# EAGLE board ict_v361-xs-180 (EAGLE 9.6.2)
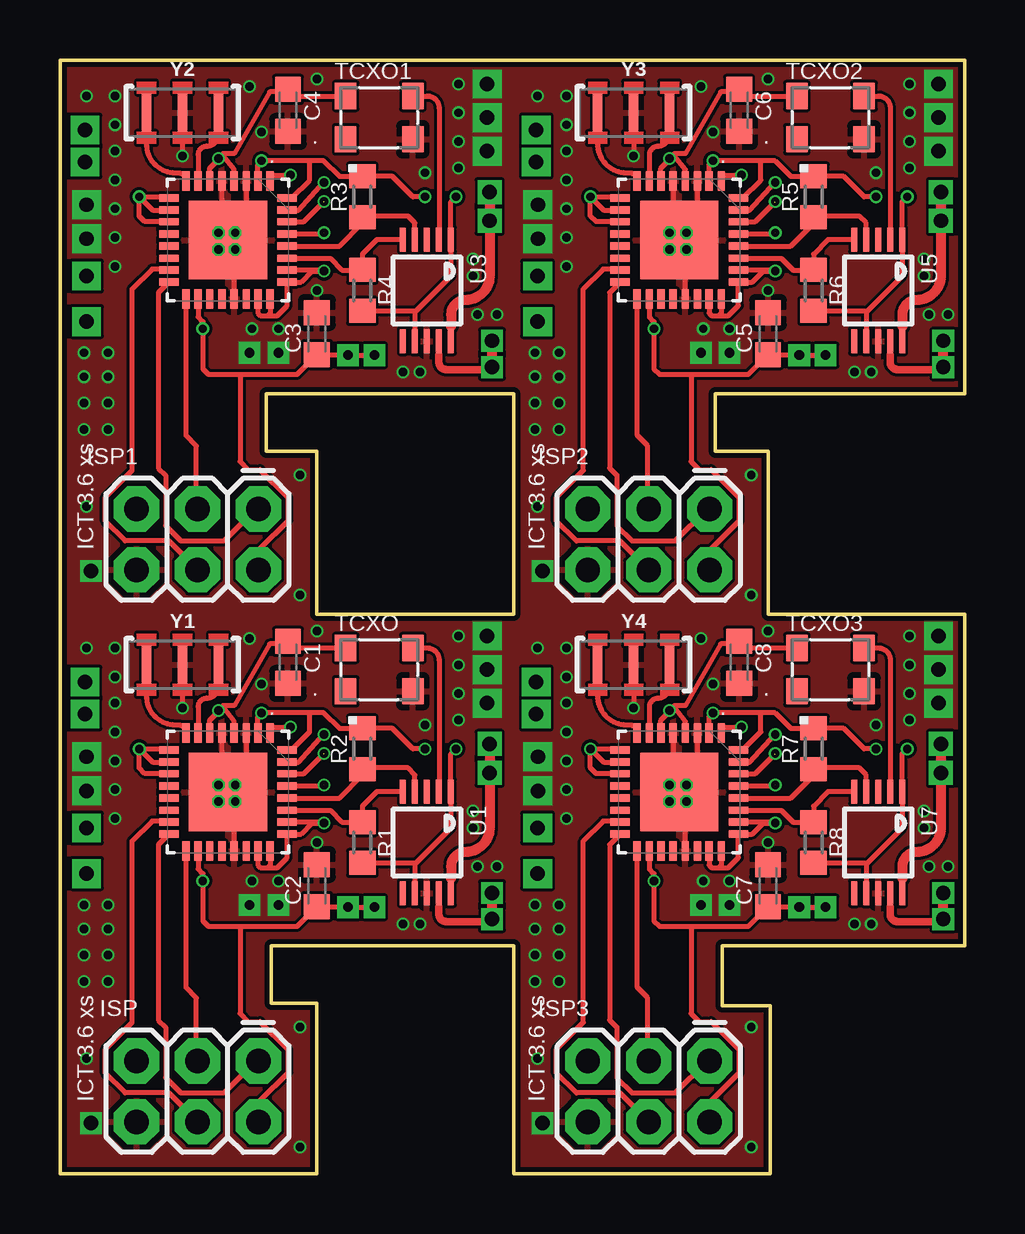
[diagram p0: board, top side]
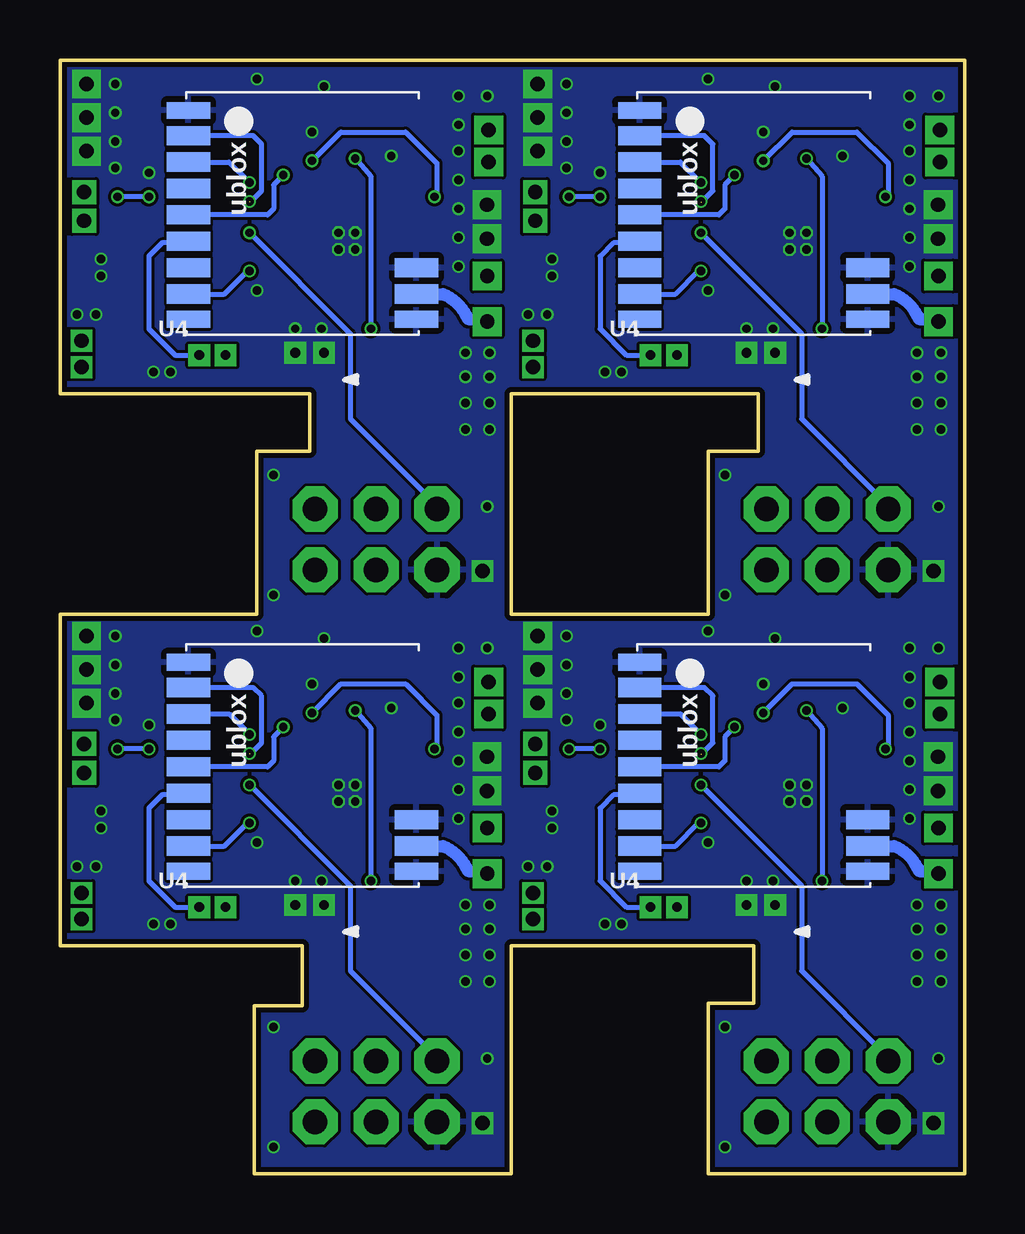
[diagram p1: board, bottom side, seen from below]

Size 37.7 x 46.4 mm. Coordinates in mm from the lower left corner, seen from the top.
Outline: 0,46.4 0,0 10.7,0 10.7,7.1 8.8,7.1 8.8,9.5 18.9,9.5 18.9,0 29.6,0 29.6,7 27.6,7 27.6,9.5 37.7,9.5 37.7,23.3 29.5,23.3 29.5,30.1 27.3,30.1 27.3,32.5 37.7,32.5 37.7,46.4 0,46.4
Outline: 10.7,30.1 10.7,23.3 18.9,23.3 18.9,32.5 8.6,32.5 8.6,30.1 10.7,30.1
Copper layers (1*16): Top 0.035559375mm / dielectric 1.6mm / Bottom 0.035559375mm
Design rules "jlcpcb2layer *": minimum track width 5mil, minimum drill 12mil, track to track 5mil, track to pad 5mil, pad to pad 5mil, via to via 5mil, smd to smd 5mil, copper to edge 8mil, drill to drill 6mil, minimum pad ring 5mil, minimum via ring 3mil, stop-mask expansion 2.5mil, vias tented up to drill 14mil, thermal gap 10mil
Net classes: 0 default: width 0.203 mm; 1 vcc: width 0.152 mm, clearance 0.152 mm

## Footprints (pad centres in the part's own frame; a part is rotated, then mirrored left to right if it is on the bottom)
C0603K = smd 1.05 x 1.08: 1 -0.875,0; 2 0.875,0
UBLOX_MAX = smd 1.8 x 0.7: 1_GND 4.95,-4.4; 9_V_RESET 4.95,4.3; 10_GND -4.55,4.3 | smd 1.8 x 0.8: 2_TXD1 4.95,-3.35; 3_RXD1 4.95,-2.25; 4_TIMEPULSE 4.95,-1.15; 5_EXTINT0 4.95,-0.05; 6_V_BCKP 4.95,1.05; 7_VCC_IO 4.95,2.15; 8_VCC 4.95,3.25; 11_RF_IN -4.55,3.25; 12_GND -4.55,2.15
2X3 = drill 1.016 pad 1.88 octagon: 1 0,0; 2 0,2.54; 3 2.54,0; 4 2.54,2.54; 5 5.08,0; 6 5.08,2.54
R0603 = smd 1 x 1.1: 1 -0.85,0; 2 0.85,0
3.2X2.5_KXO-84-TCXO = smd 0.9 x 1.1: 1 -1.4,-0.9; 2 1.4,-0.9; 3 1.4,0.9; 4 -1.4,0.9
MSOP10 = smd 0.25 x 1: 1 -1,-2.113; 2 -0.5,-2.113; 3 0,-2.113; 4 0.5,-2.113; 5 1,-2.113; 6 1,2.113; 7 0.5,2.113; 8 0,2.113; 9 -0.5,2.113; 10 -1,2.113
QFN50P500X500X100-33N = smd 0.813 x 0.305: 1 -2.464,1.753; 2 -2.464,1.245; 3 -2.464,0.762; 4 -2.464,0.254; 5 -2.464,-0.254; 6 -2.464,-0.762; 7 -2.464,-1.245; 8 -2.464,-1.753; 17 2.464,-1.753; 18 2.464,-1.245; 19 2.464,-0.762; 20 2.464,-0.254; 21 2.464,0.254; 22 2.464,0.762; 23 2.464,1.245; 24 2.464,1.753 | smd 0.305 x 0.813: 9 -1.753,-2.464; 10 -1.245,-2.464; 11 -0.762,-2.464; 12 -0.254,-2.464; 13 0.254,-2.464; 14 0.762,-2.464; 15 1.245,-2.464; 16 1.753,-2.464; 25 1.753,2.464; 26 1.245,2.464; 27 0.762,2.464; 28 0.254,2.464; 29 -0.254,2.464; 30 -0.762,2.464; 31 -1.245,2.464; 32 -1.753,2.464 | smd 3.251 x 3.251: 33 0,0
RESONATOR-SMD-4.5X2.0 = smd 0.4 x 1.6: 1 -1.5,0; 2 0,0; 3 1.5,0

## Placement (x,y rotation side)
C1  [C0603K]  9.5,21.3 270 top
C2  [C0603K]  10.7,12 90 top
C3  [C0603K]  10.7,35 90 top
C4  [C0603K]  9.5,44.3 270 top
C5  [C0603K]  29.5,35 90 top
C6  [C0603K]  28.3,44.3 270 top
C7  [C0603K]  29.5,12 90 top
C8  [C0603K]  28.3,21.3 270 top
GPS  UBLOX_MAX  [UBLOX_MAX]  8.6,16.9 180 bottom
GPS1  UBLOX_MAX  [UBLOX_MAX]  8.6,39.9 180 bottom
GPS2  UBLOX_MAX  [UBLOX_MAX]  27.4,39.9 180 bottom
GPS3  UBLOX_MAX  [UBLOX_MAX]  27.4,16.9 180 bottom
ISP  [2X3]  8.27,4.69 180 top
ISP1  [2X3]  8.27,27.69 180 top
ISP2  [2X3]  27.07,27.69 180 top
ISP3  [2X3]  27.07,4.69 180 top
R1  [R0603]  12.6,13.8 270 top
R2  [R0603]  12.6,17.7 90 top
R3  [R0603]  12.6,40.7 90 top
R4  [R0603]  12.6,36.8 270 top
R5  [R0603]  31.4,40.7 90 top
R6  [R0603]  31.4,36.8 270 top
R7  [R0603]  31.4,17.7 90 top
R8  [R0603]  31.4,13.8 270 top
TCXO  [3.2X2.5_KXO-84-TCXO]  13.3,21 0 top
TCXO1  [3.2X2.5_KXO-84-TCXO]  13.3,44 0 top
TCXO2  [3.2X2.5_KXO-84-TCXO]  32.1,44 0 top
TCXO3  [3.2X2.5_KXO-84-TCXO]  32.1,21 0 top
U1  Si5351  [MSOP10]  15.29,13.8 180 top
U2  ATMEGA328P-MU  [QFN50P500X500X100-33N]  7,15.9 270 top
U3  Si5351  [MSOP10]  15.29,36.8 180 top
U4  ATMEGA328P-MU  [QFN50P500X500X100-33N]  7,38.9 270 top
U5  Si5351  [MSOP10]  34.09,36.8 180 top
U6  ATMEGA328P-MU  [QFN50P500X500X100-33N]  25.8,38.9 270 top
U7  Si5351  [MSOP10]  34.09,13.8 180 top
U8  ATMEGA328P-MU  [QFN50P500X500X100-33N]  25.8,15.9 270 top
Y1  [RESONATOR-SMD-4.5X2.0]  5.1,21.2 0 top
Y2  [RESONATOR-SMD-4.5X2.0]  5.1,44.2 0 top
Y3  [RESONATOR-SMD-4.5X2.0]  23.9,44.2 0 top
Y4  [RESONATOR-SMD-4.5X2.0]  23.9,21.2 0 top

## Library data of the parts
C1-C8 = rcl; SPICEPREFIX: C
GPS GPS1-GPS3 = Max gps
ISP ISP1-ISP3 = SparkFun
R1-R8 = resistor
TCXO TCXO1-TCXO3 = crystal-geyer_V1_0
U1 U3 U5 U7 = microbuilder
U2 U4 U6 U8 = ava; MPN: ATMEGA328P-MU; OC_FARNELL: 1748522; OC_NEWARK: 26R2526; PACKAGE: QFN-32; SUPPLIER: Atmel
Y1-Y4 = SparkFun-Clocks

## Nets
7_VCC_IO: GPS.7_VCC_IO
7_VCC_IO1: GPS1.7_VCC_IO
7_VCC_IO2: GPS2.7_VCC_IO
7_VCC_IO3: GPS3.7_VCC_IO
9_V_RESET: GPS.9_V_RESET
9_V_RESET1: GPS1.9_V_RESET
9_V_RESET2: GPS2.9_V_RESET
9_V_RESET3: GPS3.9_V_RESET
ANT: U1.10
ANT1: U3.10
ANT2: U3.9
ANT3: U5.10
ANT4: U5.9
ANT5: U7.10
ANT6: U7.9
ANT180: U1.9
ENABLE: R1.2 R2.2 U1.1 U1.7 U2.2 U2.9 U2.10 U2.11 U2.32
ENABLE1: R3.2 R4.2 U3.1 U3.7 U4.2 U4.9 U4.10 U4.11 U4.32
ENABLE2: R5.2 R6.2 U5.1 U5.7 U6.2 U6.9 U6.10 U6.11 U6.32
ENABLE3: R7.2 R8.2 U7.1 U7.7 U8.2 U8.9 U8.10 U8.11 U8.32
GND: C1.2 C2.2 C3.2 C4.2 C5.2 C6.2 C7.2 C8.2 GPS1.1_GND GPS1.10_GND GPS1.12_GND GPS2.1_GND GPS2.10_GND GPS2.12_GND GPS3.1_GND GPS3.10_GND GPS3.12_GND GPS.1_GND GPS.10_GND GPS.12_GND ISP1.6 ISP2.6 ISP3.6 ISP.6 TCXO1.2 TCXO2.2 TCXO3.2 TCXO.2 U1.8 U2.3 U2.5 U2.21 U2.33 U3.8 U4.3 U4.5 U4.21 U4.33 U5.8 U6.3 U6.5 U6.21 U6.33 U7.8 U8.3 U8.5 U8.21 U8.33 Y1.2 Y2.2 Y3.2 Y4.2
GND/NC: TCXO.1
GND/NC1: TCXO1.1
GND/NC2: TCXO2.1
GND/NC3: TCXO3.1
GPS: GPS.11_RF_IN
GPS1: GPS1.11_RF_IN
GPS2: GPS2.11_RF_IN
GPS3: GPS3.11_RF_IN
GPS-OFF: GPS.5_EXTINT0 U2.1
GPS-OFF1: GPS1.5_EXTINT0 U4.1
GPS-OFF2: GPS2.5_EXTINT0 U6.1
GPS-OFF3: GPS3.5_EXTINT0 U8.1
GPS_POWER: GPS.8_VCC U2.23 U2.24 U2.25 U2.26
GPS_POWER1: GPS1.8_VCC U4.23 U4.24 U4.25 U4.26
GPS_POWER2: GPS2.8_VCC U6.23 U6.24 U6.25 U6.26
GPS_POWER3: GPS3.8_VCC U8.23 U8.24 U8.25 U8.26
MISO: ISP.1 U2.16
MISO1: ISP1.1 U4.16
MISO2: ISP2.1 U6.16
MISO3: ISP3.1 U8.16
MOSI: ISP.4 U2.15
MOSI1: ISP1.4 U4.15
MOSI2: ISP2.4 U6.15
MOSI3: ISP3.4 U8.15
N$1: U2.7 Y1.3
N$3: U2.8 Y1.1
N$9: TCXO1.3 U3.2
N$14: U4.7 Y2.3
N$15: U4.8 Y2.1
N$17: TCXO2.3 U5.2
N$19: TCXO.3 U1.2
N$21: U6.7 Y3.3
N$22: U6.8 Y3.1
N$24: TCXO3.3 U7.2
N$27: U8.7 Y4.3
N$28: U8.8 Y4.1
RESET: ISP.5 U2.29
RESET1: ISP1.5 U4.29
RESET2: ISP2.5 U6.29
RESET3: ISP3.5 U8.29
SCK: ISP.3 U2.17
SCK1: ISP1.3 U4.17
SCK2: ISP2.3 U6.17
SCK3: ISP3.3 U8.17
SCL: R2.1 U1.4 U2.28
SCL1: R3.1 U3.4 U4.28
SCL2: R5.1 U5.4 U6.28
SCL3: R7.1 U7.4 U8.28
SDA: R1.1 U1.5 U2.27
SDA1: R4.1 U3.5 U4.27
SDA2: R6.1 U5.5 U6.27
SDA3: R8.1 U7.5 U8.27
SERIAL_IN: GPS.2_TXD1 U2.30
SERIAL_IN1: GPS1.2_TXD1 U4.30
SERIAL_IN2: GPS2.2_TXD1 U6.30
SERIAL_IN3: GPS3.2_TXD1 U8.30
SERIAL_OUT: GPS.3_RXD1 U2.31
SERIAL_OUT1: GPS1.3_RXD1 U4.31
SERIAL_OUT2: GPS2.3_RXD1 U6.31
SERIAL_OUT3: GPS3.3_RXD1 U8.31
VIN: C1.1 C2.1 GPS.6_V_BCKP ISP.2 TCXO.4 U2.4 U2.6 U2.18
VIN1: C3.1 C4.1 GPS1.6_V_BCKP ISP1.2 TCXO1.4 U4.4 U4.6 U4.18
VIN2: C5.1 C6.1 GPS2.6_V_BCKP ISP2.2 TCXO2.4 U6.4 U6.6 U6.18
VIN3: C7.1 C8.1 GPS3.6_V_BCKP ISP3.2 TCXO3.4 U8.4 U8.6 U8.18

## Tracks (layer width: path | path; a pad name or v marks a point on that pad's centre or on a via)
ANT  (via drill 0.6 pad 1)
  Top 0.203: 16.3,12.3 16.29,12.29 U1.10
  Top 0.406: 16.3,12.3 16.3,12.8 arc-90 16.9,13.4 arc90 17.9,14.4 v17.9,16.7 v17.9,17.9
ANT1  (via drill 0.6 pad 1)
  Top 0.203: 16.3,35.3 16.29,35.29 U3.10
  Top 0.406: 16.3,35.3 16.3,35.8 arc-90 16.9,36.4 arc90 17.9,37.4 v17.9,39.7 v17.9,40.9
ANT2  (via drill 0.6 pad 0.9)
  Top 0.203: U3.9 15.79,34.11 15.8,34.1
  Top 0.305: 15.79,34.11 15.79,33.81 arc90 16.1,33.5 17.9,33.5
  Top 0.406: 17.9,33.5 v18,33.6 v18,34.7
ANT3  (via drill 0.6 pad 1)
  Top 0.203: 35.1,35.3 35.09,35.29 U5.10
  Top 0.406: 35.1,35.3 35.1,35.8 arc-90 35.7,36.4 arc90 36.7,37.4 v36.7,39.7 v36.7,40.9
ANT4  (via drill 0.6 pad 0.9)
  Top 0.203: U5.9 34.59,34.11 34.6,34.1
  Top 0.305: 34.59,34.11 34.59,33.81 arc90 34.9,33.5 36.7,33.5
  Top 0.406: 36.7,33.5 v36.8,33.6 v36.8,34.7
ANT5  (via drill 0.6 pad 1)
  Top 0.203: 35.1,12.3 35.09,12.29 U7.10
  Top 0.406: 35.1,12.3 35.1,12.8 arc-90 35.7,13.4 arc90 36.7,14.4 v36.7,16.7 v36.7,17.9
ANT6  (via drill 0.6 pad 0.9)
  Top 0.203: U7.9 34.59,11.11 34.6,11.1
  Top 0.305: 34.59,11.11 34.59,10.81 arc90 34.9,10.5 36.7,10.5
  Top 0.406: 36.7,10.5 v36.8,10.6 v36.8,11.7
ANT180  (via drill 0.6 pad 0.9)
  Top 0.203: U1.9 15.79,11.11 15.8,11.1
  Top 0.305: 15.79,11.11 15.79,10.81 arc90 16.1,10.5 17.9,10.5
  Top 0.406: 17.9,10.5 v18,10.6 v18,11.7
ENABLE  (via drill 0.35)
  Top 0.203: 14.79,12.89 U1.7 14.8,11.43 | 14.79,12.89 16.29,14.39 U1.1 16.29,17.49 v16.5,17.7 | R1.2 14.73,12.95 14.79,12.89 | 10.4,19.2 11,19.2 11.65,18.55 R2.2 13.85,18.55 14.7,17.7 v15.2,17.7 | 10.4,19.2 v8.4,19.2 8.24,19.05 U2.2 | U2.32 9.65,17.65 10.4,18.4 10.4,19.2 | v3.3,17.7 4.49,17.7 U2.9 | v3.3,17.7 3.86,17.15 U2.10 | v3.3,17.7 3.3,16.9 3.54,16.66 U2.11
  Bottom 0.203: v15.2,17.7 v16.5,17.7 | v8.4,19.2 7.2,20.4 4.5,20.4 3.2,19.1 3.2,17.8 v3.3,17.7
ENABLE1  (via drill 0.35)
  Top 0.203: 14.79,35.89 U3.7 14.8,34.43 | 14.79,35.89 16.29,37.39 U3.1 16.29,40.49 v16.5,40.7 | R4.2 14.73,35.95 14.79,35.89 | 10.4,42.2 11,42.2 11.65,41.55 R3.2 13.85,41.55 14.7,40.7 v15.2,40.7 | 10.4,42.2 v8.4,42.2 8.24,42.05 U4.2 | U4.32 9.65,40.65 10.4,41.4 10.4,42.2 | v3.3,40.7 4.49,40.7 U4.9 | v3.3,40.7 3.86,40.15 U4.10 | v3.3,40.7 3.3,39.9 3.54,39.66 U4.11
  Bottom 0.203: v15.2,40.7 v16.5,40.7 | v8.4,42.2 7.2,43.4 4.5,43.4 3.2,42.1 3.2,40.8 v3.3,40.7
ENABLE2  (via drill 0.35)
  Top 0.203: 33.59,35.89 U5.7 33.6,34.43 | 33.59,35.89 35.09,37.39 U5.1 35.09,40.49 v35.3,40.7 | R6.2 33.53,35.95 33.59,35.89 | 29.2,42.2 29.8,42.2 30.45,41.55 R5.2 32.65,41.55 33.5,40.7 v34,40.7 | 29.2,42.2 v27.2,42.2 27.05,42.05 U6.2 | U6.32 28.45,40.65 29.2,41.4 29.2,42.2 | v22.1,40.7 23.29,40.7 U6.9 | v22.1,40.7 22.66,40.15 U6.10 | v22.1,40.7 22.1,39.9 22.34,39.66 U6.11
  Bottom 0.203: v34,40.7 v35.3,40.7 | v27.2,42.2 26,43.4 23.3,43.4 22,42.1 22,40.8 v22.1,40.7
ENABLE3  (via drill 0.35)
  Top 0.203: 33.59,12.89 U7.7 33.6,11.43 | 33.59,12.89 35.09,14.39 U7.1 35.09,17.49 v35.3,17.7 | R8.2 33.53,12.95 33.59,12.89 | 29.2,19.2 29.8,19.2 30.45,18.55 R7.2 32.65,18.55 33.5,17.7 v34,17.7 | 29.2,19.2 v27.2,19.2 27.05,19.05 U8.2 | U8.32 28.45,17.65 29.2,18.4 29.2,19.2 | v22.1,17.7 23.29,17.7 U8.9 | v22.1,17.7 22.66,17.15 U8.10 | v22.1,17.7 22.1,16.9 22.34,16.66 U8.11
  Bottom 0.203: v34,17.7 v35.3,17.7 | v27.2,19.2 26,20.4 23.3,20.4 22,19.1 22,17.8 v22.1,17.7
GND  (via drill 0.35, 0.4 pad 0.9, 0.6 pad 0.7, 0.6 pad 1.2)
  Top 0.203: 7.8,18.33 U2.3 7.76,16.66 U2.33 | 5.1,20.7 v5.1,19.4 | U2.21 7.25,15.65 U2.33 | U2.5 6.75,16.15 U2.33 | 26.6,18.33 U8.3 26.56,16.66 U8.33 | 23.9,20.7 v23.9,19.4 | U8.21 26.05,15.65 U8.33 | U8.5 25.55,16.15 U8.33 | 7.8,41.33 U4.3 7.76,39.66 U4.33 | 5.1,43.7 v5.1,42.4 | U4.21 7.25,38.65 U4.33 | U4.5 6.75,39.15 U4.33 | 26.6,41.33 U6.3 26.56,39.66 U6.33 | 23.9,43.7 v23.9,42.4 | U6.21 26.05,38.65 U6.33 | U6.5 25.55,39.15 U6.33
  other vias: 2.3,19.6 15,10.4 1.11,17.37 1.11,15.95 1.1,21.9 10.7,13.8 2,11.2 2.3,14.8 2.3,16 7.9,11.2 2.3,17.2 2.3,18.4 9.1,11.2 2.3,20.7 2.3,21.9 1,9.1 1,11.2 8,12.2 9.1,12.2 7.3,16.2 6.6,16.2 6.6,15.5 7.3,15.5 16.6,22.4 16.6,20 16.6,18.9 10.7,22.6 16.6,21.2 18.2,12.8 7.9,22.3 1.3,2.1 15.2,18.7 8.4,20.4 17.2,14.4 17.4,12.8 17.8,22.4 17.8,21 14.3,10.4 17.2,15.1 17.8,19.6 1,10.2 2,10.2 2,9.1 2,8 1,8 10,6.1 10,1.1 1.1,4.8 21.1,19.6 33.8,10.4 19.91,17.37 19.91,15.95 19.9,21.9 29.5,13.8 20.8,11.2 21.1,14.8 21.1,16 26.7,11.2 21.1,17.2 21.1,18.4 27.9,11.2 21.1,20.7 21.1,21.9 19.8,9.1 19.8,11.2 26.8,12.2 27.9,12.2 26.1,16.2 25.4,16.2 25.4,15.5 26.1,15.5 35.4,22.4 35.4,20 35.4,18.9 29.5,22.6 35.4,21.2 37,12.8 26.7,22.3 20.1,2.1 34,18.7 27.2,20.4 36,14.4 36.2,12.8 36.6,22.4 36.6,21 33.1,10.4 36,15.1 36.6,19.6 19.8,10.2 20.8,10.2 20.8,9.1 20.8,8 19.8,8 28.8,6.1 28.8,1.1 19.9,4.8 2.3,42.6 15,33.4 1.11,40.37 1.11,38.95 1.1,44.9 10.7,36.8 2,34.2 2.3,37.8 2.3,39 7.9,34.2 2.3,40.2 2.3,41.4 9.1,34.2 2.3,43.7 2.3,44.9 1,32.1 1,34.2 8,35.2 9.1,35.2 7.3,39.2 6.6,39.2 6.6,38.5 7.3,38.5 16.6,45.4 16.6,43 16.6,41.9 10.7,45.6 16.6,44.2 18.2,35.8 7.9,45.3 1.3,25.1 15.2,41.7 8.4,43.4 17.2,37.4 17.4,35.8 17.8,45.4 17.8,44 14.3,33.4 17.2,38.1 17.8,42.6 1,33.2 2,33.2 2,32.1 2,31 1,31 10,29.1 10,24.1 1.1,27.8 21.1,42.6 33.8,33.4 19.91,40.37 19.91,38.95 19.9,44.9 29.5,36.8 20.8,34.2 21.1,37.8 21.1,39 26.7,34.2 21.1,40.2 21.1,41.4 27.9,34.2 21.1,43.7 21.1,44.9 19.8,32.1 19.8,34.2 26.8,35.2 27.9,35.2 26.1,39.2 25.4,39.2 25.4,38.5 26.1,38.5 35.4,45.4 35.4,43 35.4,41.9 29.5,45.6 35.4,44.2 37,35.8 26.7,45.3 20.1,25.1 34,41.7 27.2,43.4 36,37.4 36.2,35.8 36.6,45.4 36.6,44 33.1,33.4 36,38.1 36.6,42.6 19.8,33.2 20.8,33.2 20.8,32.1 20.8,31 19.8,31 28.8,29.1 28.8,24.1 19.9,27.8
  pour Top: -5.59,52.02 46.75,52.02 46.75,-4.99 -5.59,-4.99
  pour Bottom: -5.59,52.02 46.75,52.02 46.75,-4.99 -5.59,-4.99
GPS  (via drill 0.6 pad 1.2)
  Bottom 0.508: GPS.11_RF_IN 2.95,13.65 arc45 1.9,12.6 1.2,12.6 v1.1,12.5
GPS1  (via drill 0.6 pad 1.2)
  Bottom 0.508: GPS1.11_RF_IN 2.95,36.65 arc45 1.9,35.6 1.2,35.6 v1.1,35.5
GPS2  (via drill 0.6 pad 1.2)
  Bottom 0.508: GPS2.11_RF_IN 21.75,36.65 arc45 20.7,35.6 20,35.6 v19.9,35.5
GPS3  (via drill 0.6 pad 1.2)
  Bottom 0.508: GPS3.11_RF_IN 21.75,13.65 arc45 20.7,12.6 20,12.6 v19.9,12.5
GPS-OFF  (via drill 0.35)
  Top 0.203: U2.1 8.75,18.46 8.89,18.6 v9.6,18.6
  Bottom 0.203: v9.6,18.6 10,18.2 10,17.2 10.25,16.95 GPS.5_EXTINT0
GPS-OFF1  (via drill 0.35)
  Top 0.203: U4.1 8.75,41.46 8.89,41.6 v9.6,41.6
  Bottom 0.203: v9.6,41.6 10,41.2 10,40.2 10.25,39.95 GPS1.5_EXTINT0
GPS-OFF2  (via drill 0.35)
  Top 0.203: U6.1 27.55,41.46 27.69,41.6 v28.4,41.6
  Bottom 0.203: v28.4,41.6 28.8,41.2 28.8,40.2 29.05,39.95 GPS2.5_EXTINT0
GPS-OFF3  (via drill 0.35)
  Top 0.203: U8.1 27.55,18.46 27.69,18.6 v28.4,18.6
  Bottom 0.203: v28.4,18.6 28.8,18.2 28.8,17.2 29.05,16.95 GPS3.5_EXTINT0
GPS_POWER  (via drill 0.35)
  Top 0.203: 8.79,13.4 U2.24 8.75,12.85 8.65,12.75 | 9.56,14.65 U2.26 10.94,14.65 v11,14.6 10.5,14.6 10.05,14.15 U2.25 9.46,13.16 9.05,12.75 8.65,12.75 | U2.23 8.24,12.85 8.35,12.75 8.65,12.75
  Bottom 0.203: GPS.8_VCC 12.05,13.65 11.1,14.6 v11,14.6
GPS_POWER1  (via drill 0.35)
  Top 0.203: 8.79,36.4 U4.24 8.75,35.85 8.65,35.75 | 9.56,37.66 U4.26 10.94,37.66 v11,37.6 10.5,37.6 10.05,37.15 U4.25 9.46,36.16 9.05,35.75 8.65,35.75 | U4.23 8.24,35.86 8.35,35.75 8.65,35.75
  Bottom 0.203: GPS1.8_VCC 12.05,36.65 11.1,37.6 v11,37.6
GPS_POWER2  (via drill 0.35)
  Top 0.203: 27.59,36.4 U6.24 27.55,35.85 27.45,35.75 | 28.36,37.66 U6.26 29.75,37.66 v29.8,37.6 29.3,37.6 28.85,37.15 U6.25 28.26,36.16 27.85,35.75 27.45,35.75 | U6.23 27.05,35.86 27.15,35.75 27.45,35.75
  Bottom 0.203: GPS2.8_VCC 30.85,36.65 29.9,37.6 v29.8,37.6
GPS_POWER3  (via drill 0.35)
  Top 0.203: 27.59,13.4 U8.24 27.55,12.85 27.45,12.75 | 28.36,14.65 U8.26 29.75,14.65 v29.8,14.6 29.3,14.6 28.85,14.15 U8.25 28.26,13.16 27.85,12.75 27.45,12.75 | U8.23 27.05,12.85 27.15,12.75 27.45,12.75
  Bottom 0.203: GPS3.8_VCC 30.85,13.65 29.9,14.6 v29.8,14.6
MISO
  Top 0.203: ISP.1 8.16,4.69 6.84,3.36 5.04,3.36 4.4,4 4.4,6.1 4.1,6.4 4.1,13.71 U2.16
MISO1
  Top 0.203: ISP1.1 8.16,27.69 6.84,26.36 5.04,26.36 4.4,27 4.4,29.1 4.1,29.4 4.1,36.71 U4.16
MISO2
  Top 0.203: ISP2.1 26.96,27.69 25.64,26.36 23.84,26.36 23.2,27 23.2,29.1 22.9,29.4 22.9,36.71 U6.16
MISO3
  Top 0.203: ISP3.1 26.96,4.69 25.64,3.36 23.84,3.36 23.2,4 23.2,6.1 22.9,6.4 22.9,13.71 U8.16
MOSI
  Top 0.203: U2.15 4.47,14.66 | 4.63,14.69 U2.15 | U2.15 4.5,14.69 3.83,14.69 3,13.86 3,6.3 1.89,5.18 1.89,4.19 2.71,3.36 4.53,3.36 5.69,2.21 ISP.4
MOSI1
  Top 0.203: U4.15 4.47,37.66 | 4.63,37.69 U4.15 | U4.15 4.5,37.69 3.83,37.69 3,36.86 3,29.3 1.89,28.18 1.89,27.19 2.71,26.36 4.53,26.36 5.69,25.21 ISP1.4
MOSI2
  Top 0.203: U6.15 23.27,37.66 | 23.43,37.69 U6.15 | U6.15 23.3,37.69 22.63,37.69 21.8,36.86 21.8,29.3 20.69,28.18 20.69,27.19 21.51,26.36 23.33,26.36 24.48,25.21 ISP2.4
MOSI3
  Top 0.203: U8.15 23.27,14.66 | 23.43,14.69 U8.15 | U8.15 23.3,14.69 22.63,14.69 21.8,13.86 21.8,6.3 20.69,5.18 20.69,4.19 21.51,3.36 23.33,3.36 24.48,2.21 ISP3.4
N$1
  Top 0.203: Y1.3 6.6,20.3 arc-90 6.1,19.8 arc90 5.75,19.45 U2.7
N$2  (via drill 0.6 pad 1.2)
  other vias: 1.1,14.4
N$3
  Top 0.203: Y1.1 3.6,19.9 arc90 4.8,18.7 4.91,18.7 arc-90 U2.8
N$7  (via drill 0.6 pad 1.2)
  other vias: 1.04,20.48
N$8  (via drill 0.6 pad 1.2)
  other vias: 1.04,19.15
N$9
  Top 0.203: TCXO1.3 15.3,44.9 arc-90 15.8,44.4 15.8,38.92 arc-90 U3.2
N$10  (via drill 0.6 pad 1.2)
  other vias: 1.04,43.48
N$11  (via drill 0.6 pad 1.2)
  other vias: 1.04,42.15
N$14
  Top 0.203: Y2.3 6.6,43.3 arc-90 6.1,42.8 arc90 5.75,42.45 U4.7
N$15
  Top 0.203: Y2.1 3.6,42.9 arc90 4.8,41.7 4.91,41.7 arc-90 U4.8
N$16  (via drill 0.6 pad 1.2)
  other vias: 1.1,37.4
N$17
  Top 0.203: TCXO2.3 34.1,44.9 arc-90 34.6,44.4 34.6,38.92 arc-90 U5.2
N$18  (via drill 0.6 pad 1.2)
  other vias: 19.84,43.48
N$19
  Top 0.203: TCXO.3 15.3,21.9 arc-90 15.8,21.4 15.8,15.92 arc-90 U1.2
N$20  (via drill 0.6 pad 1.2)
  other vias: 19.84,42.15
N$21
  Top 0.203: Y3.3 25.4,43.3 arc-90 24.9,42.8 arc90 24.55,42.45 U6.7
N$22
  Top 0.203: Y3.1 22.4,42.9 arc90 23.6,41.7 23.71,41.7 arc-90 U6.8
N$23  (via drill 0.6 pad 1.2)
  other vias: 19.9,37.4
N$24
  Top 0.203: TCXO3.3 34.1,21.9 arc-90 34.6,21.4 34.6,15.92 arc-90 U7.2
N$25  (via drill 0.6 pad 1.2)
  other vias: 19.84,20.48
N$26  (via drill 0.6 pad 1.2)
  other vias: 19.84,19.15
N$27
  Top 0.203: Y4.3 25.4,20.3 arc-90 24.9,19.8 arc90 24.55,19.45 U8.7
N$28
  Top 0.203: Y4.1 22.4,19.9 arc90 23.6,18.7 23.71,18.7 arc-90 U8.8
N$29  (via drill 0.6 pad 1.2)
  other vias: 19.9,14.4
RESET  (via drill 0.35)  (1 unrouted)
  Top 0.203: v11,16.2 10.95,16.15 U2.29
  Bottom 0.203: v11,16.2 6.8,12 6.8,8.44 3.21,4.85 ISP.5
RESET1  (via drill 0.35)  (1 unrouted)
  Top 0.203: v11,39.2 10.95,39.15 U4.29
  Bottom 0.203: v11,39.2 6.8,35 6.8,31.44 3.21,27.85 ISP1.5
RESET2  (via drill 0.35)  (1 unrouted)
  Top 0.203: v29.8,39.2 29.75,39.15 U6.29
  Bottom 0.203: v29.8,39.2 25.6,35 25.6,31.44 22.01,27.85 ISP2.5
RESET3  (via drill 0.35)  (1 unrouted)
  Top 0.203: v29.8,16.2 29.75,16.15 U8.29
  Bottom 0.203: v29.8,16.2 25.6,12 25.6,8.44 22.01,4.85 ISP3.5
SCK
  Top 0.203: 5.29,13.44 U2.17 5.25,7.76 5.69,7.33 5.69,4.85 ISP.3
SCK1
  Top 0.203: 5.29,36.44 U4.17 5.25,30.76 5.69,30.33 5.69,27.85 ISP1.3
SCK2
  Top 0.203: 24.09,36.44 U6.17 24.05,30.76 24.48,30.33 24.48,27.85 ISP2.3
SCK3
  Top 0.203: 24.09,13.44 U8.17 24.05,7.76 24.48,7.33 24.48,4.85 ISP3.3
SCL
  Top 0.203: U2.28 11.65,15.65 12.6,16.6 R2.1 12.65,16.9 14.5,16.9 14.79,16.61 U1.4
SCL1
  Top 0.203: U4.28 11.65,38.65 12.6,39.6 R3.1 12.65,39.9 14.5,39.9 14.79,39.61 U3.4
SCL2
  Top 0.203: U6.28 30.45,38.65 31.4,39.6 R5.1 31.45,39.9 33.3,39.9 33.59,39.61 U5.4
SCL3
  Top 0.203: U8.28 30.45,15.65 31.4,16.6 R7.1 31.45,16.9 33.3,16.9 33.59,16.61 U7.4
SDA
  Top 0.203: U1.5 13.2,15.91 12.6,15.31 R1.1 11.75,14.65 11.26,15.14 U2.27
SDA1
  Top 0.203: U3.5 13.2,38.91 12.6,38.31 R4.1 11.75,37.65 11.26,38.14 U4.27
SDA2
  Top 0.203: U5.5 32,38.91 31.4,38.31 R6.1 30.55,37.65 30.06,38.14 U6.27
SDA3
  Top 0.203: U7.5 32,15.91 31.4,15.31 R8.1 30.55,14.65 30.06,15.14 U8.27
SERIAL_IN  (via drill 0.35)  (1 unrouted)
  Top 0.203: U2.30 10.16,16.66 v11,17.5
  Bottom 0.203: GPS.2_TXD1 10.85,20.25 10.5,19.9 10.5,17.95 10.97,17.48
SERIAL_IN1  (via drill 0.35)  (1 unrouted)
  Top 0.203: U4.30 10.16,39.66 v11,40.5
  Bottom 0.203: GPS1.2_TXD1 10.85,43.25 10.5,42.9 10.5,40.95 10.97,40.48
SERIAL_IN2  (via drill 0.35)  (1 unrouted)
  Top 0.203: U6.30 28.96,39.66 v29.8,40.5
  Bottom 0.203: GPS2.2_TXD1 29.65,43.25 29.3,42.9 29.3,40.95 29.77,40.48
SERIAL_IN3  (via drill 0.35)  (1 unrouted)
  Top 0.203: U8.30 28.96,16.66 v29.8,17.5
  Bottom 0.203: GPS3.2_TXD1 29.65,20.25 29.3,19.9 29.3,17.95 29.77,17.48
SERIAL_OUT  (via drill 0.35)
  Top 0.203: U2.31 9.94,17.15 v11,18.3
  Bottom 0.203: v11,18.3 11.85,19.15 GPS.3_RXD1
SERIAL_OUT1  (via drill 0.35)
  Top 0.203: U4.31 9.94,40.15 v11,41.3
  Bottom 0.203: v11,41.3 11.85,42.15 GPS1.3_RXD1
SERIAL_OUT2  (via drill 0.35)
  Top 0.203: U6.31 28.75,40.15 v29.8,41.3
  Bottom 0.203: v29.8,41.3 30.65,42.15 GPS2.3_RXD1
SERIAL_OUT3  (via drill 0.35)
  Top 0.203: U8.31 28.75,17.15 v29.8,18.3
  Bottom 0.203: v29.8,18.3 30.65,19.15 GPS3.3_RXD1
VIN  (via drill 0.35, 0.4 pad 0.9)
  Top 0.203: U2.18 5.75,12.69 5.95,12.5 v5.95,12.2 5.95,10.53 6.18,10.3 7.5,10.3 | 7.5,10.3 9.88,10.3 C2.1 11.97,11.12 v12,11.1 v13.1,11.1 | U2.6 6.24,18.89 6.51,19.16 v6.6,19.3 | U2.4 7.25,18.85 6.82,19.4 6.7,19.4 arc-62 v6.6,19.3 | v6.6,19.3 6.8,19.5 7.25,19.5 8.73,22.08 9.4,22.08 C1.1 9.48,21.9 TCXO.4 | 7.5,10.3 7.5,6.67 7.83,6.34 8.33,6.34 9.48,5.18 9.48,4.19 8.33,3.03 8.33,2.21 ISP.2
  Bottom 0.203: v6.6,19.3 5.95,18.55 v5.95,12.2 | GPS.6_V_BCKP 13.62,15.78 14.65,15.78 15.2,15.22 15.2,12.2 14.1,11.1 v13.1,11.1
VIN1  (via drill 0.35, 0.4 pad 0.9)
  Top 0.203: U4.18 5.75,35.69 5.95,35.5 v5.95,35.2 5.95,33.53 6.18,33.3 7.5,33.3 | 7.5,33.3 9.88,33.3 C3.1 11.97,34.12 v12,34.1 v13.1,34.1 | U4.6 6.24,41.89 6.51,42.16 v6.6,42.3 | U4.4 7.25,41.85 6.82,42.4 6.7,42.4 arc-62 v6.6,42.3 | v6.6,42.3 6.8,42.5 7.25,42.5 8.73,45.08 9.4,45.08 C4.1 9.48,44.9 TCXO1.4 | 7.5,33.3 7.5,29.67 7.83,29.34 8.33,29.34 9.48,28.18 9.48,27.19 8.33,26.03 8.33,25.21 ISP1.2
  Bottom 0.203: v6.6,42.3 5.95,41.55 v5.95,35.2 | GPS1.6_V_BCKP 13.62,38.78 14.65,38.78 15.2,38.22 15.2,35.2 14.1,34.1 v13.1,34.1
VIN2  (via drill 0.35, 0.4 pad 0.9)
  Top 0.203: U6.18 24.55,35.69 24.75,35.5 v24.75,35.2 24.75,33.53 24.98,33.3 26.3,33.3 | 26.3,33.3 28.68,33.3 C5.1 30.77,34.12 v30.8,34.1 v31.9,34.1 | U6.6 25.04,41.89 25.31,42.16 v25.4,42.3 | U6.4 26.05,41.85 25.62,42.4 25.5,42.4 arc-62 v25.4,42.3 | v25.4,42.3 25.6,42.5 26.05,42.5 27.53,45.08 28.2,45.08 C6.1 28.28,44.9 TCXO2.4 | 26.3,33.3 26.3,29.67 26.63,29.34 27.13,29.34 28.28,28.18 28.28,27.19 27.13,26.03 27.13,25.21 ISP2.2
  Bottom 0.203: v25.4,42.3 24.75,41.55 v24.75,35.2 | GPS2.6_V_BCKP 32.42,38.78 33.45,38.78 34,38.22 34,35.2 32.9,34.1 v31.9,34.1
VIN3  (via drill 0.35, 0.4 pad 0.9)
  Top 0.203: U8.18 24.55,12.69 24.75,12.5 v24.75,12.2 24.75,10.53 24.98,10.3 26.3,10.3 | 26.3,10.3 28.68,10.3 C7.1 30.77,11.12 v30.8,11.1 v31.9,11.1 | U8.6 25.04,18.89 25.31,19.16 v25.4,19.3 | U8.4 26.05,18.85 25.62,19.4 25.5,19.4 arc-62 v25.4,19.3 | v25.4,19.3 25.6,19.5 26.05,19.5 27.53,22.08 28.2,22.08 C8.1 28.28,21.9 TCXO3.4 | 26.3,10.3 26.3,6.67 26.63,6.34 27.13,6.34 28.28,5.18 28.28,4.19 27.13,3.03 27.13,2.21 ISP3.2
  Bottom 0.203: v25.4,19.3 24.75,18.55 v24.75,12.2 | GPS3.6_V_BCKP 32.42,15.78 33.45,15.78 34,15.22 34,12.2 32.9,11.1 v31.9,11.1

## Text on the board
tPlace: . | . | . | .
tNames: . | . | ICT 3.6 xs | ICT 3.6 xs | . | . | ICT 3.6 xs | ICT 3.6 xs
bNames: U4 | U4 | U4 | U4